# Altium PCB test.PcbDoc
Units mm, origin at the board's own origin, x right, y up, seen from the top; angles counter-clockwise.
Board outline 48.01 x 42.93 mm, 2 copper layers (Top Layer, Bottom Layer); 5 components, 0 nets, 72 pads, 0 vias.
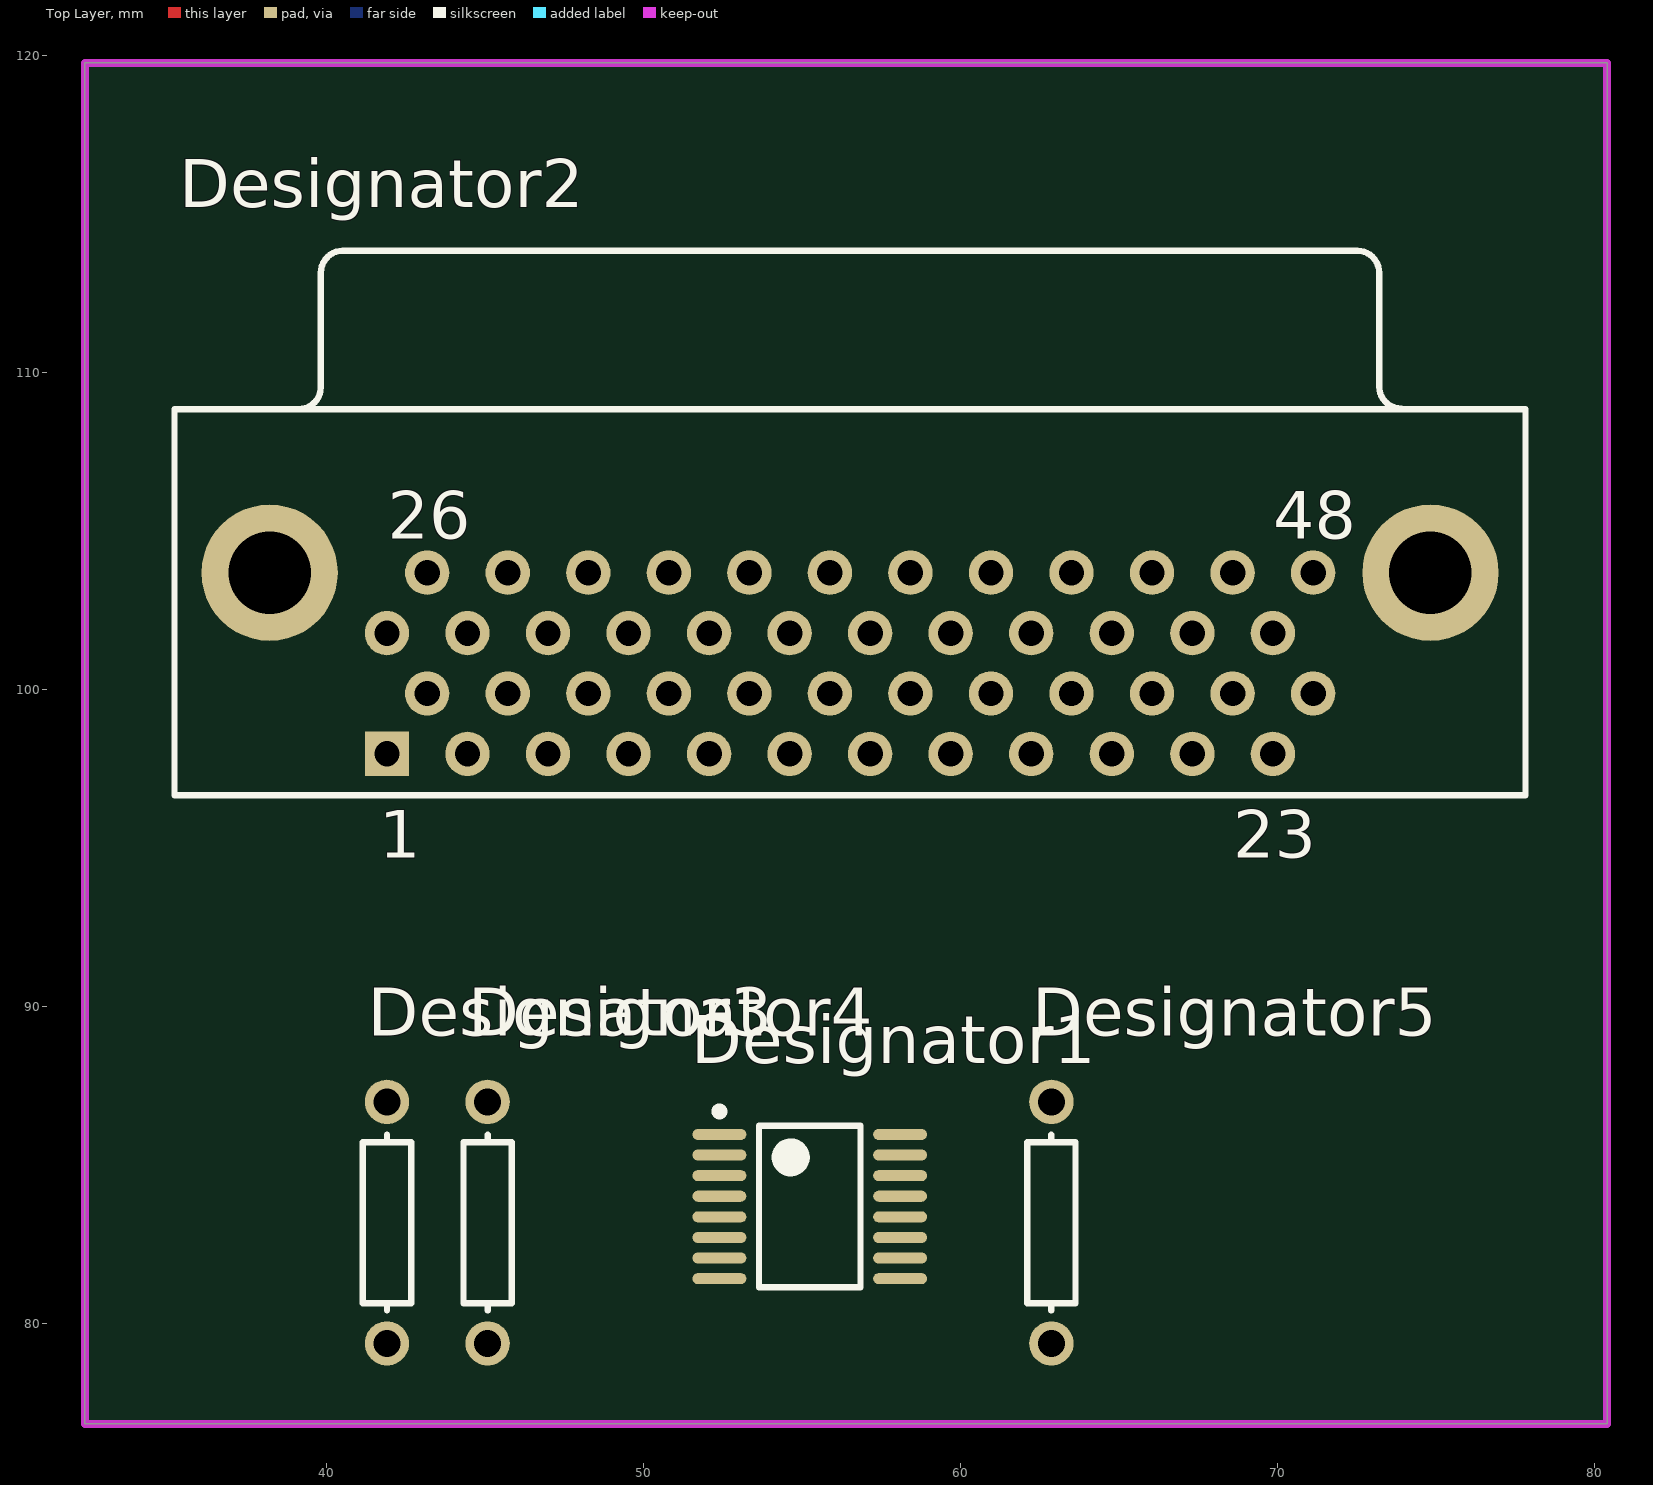
[diagram p0: Top Layer view]
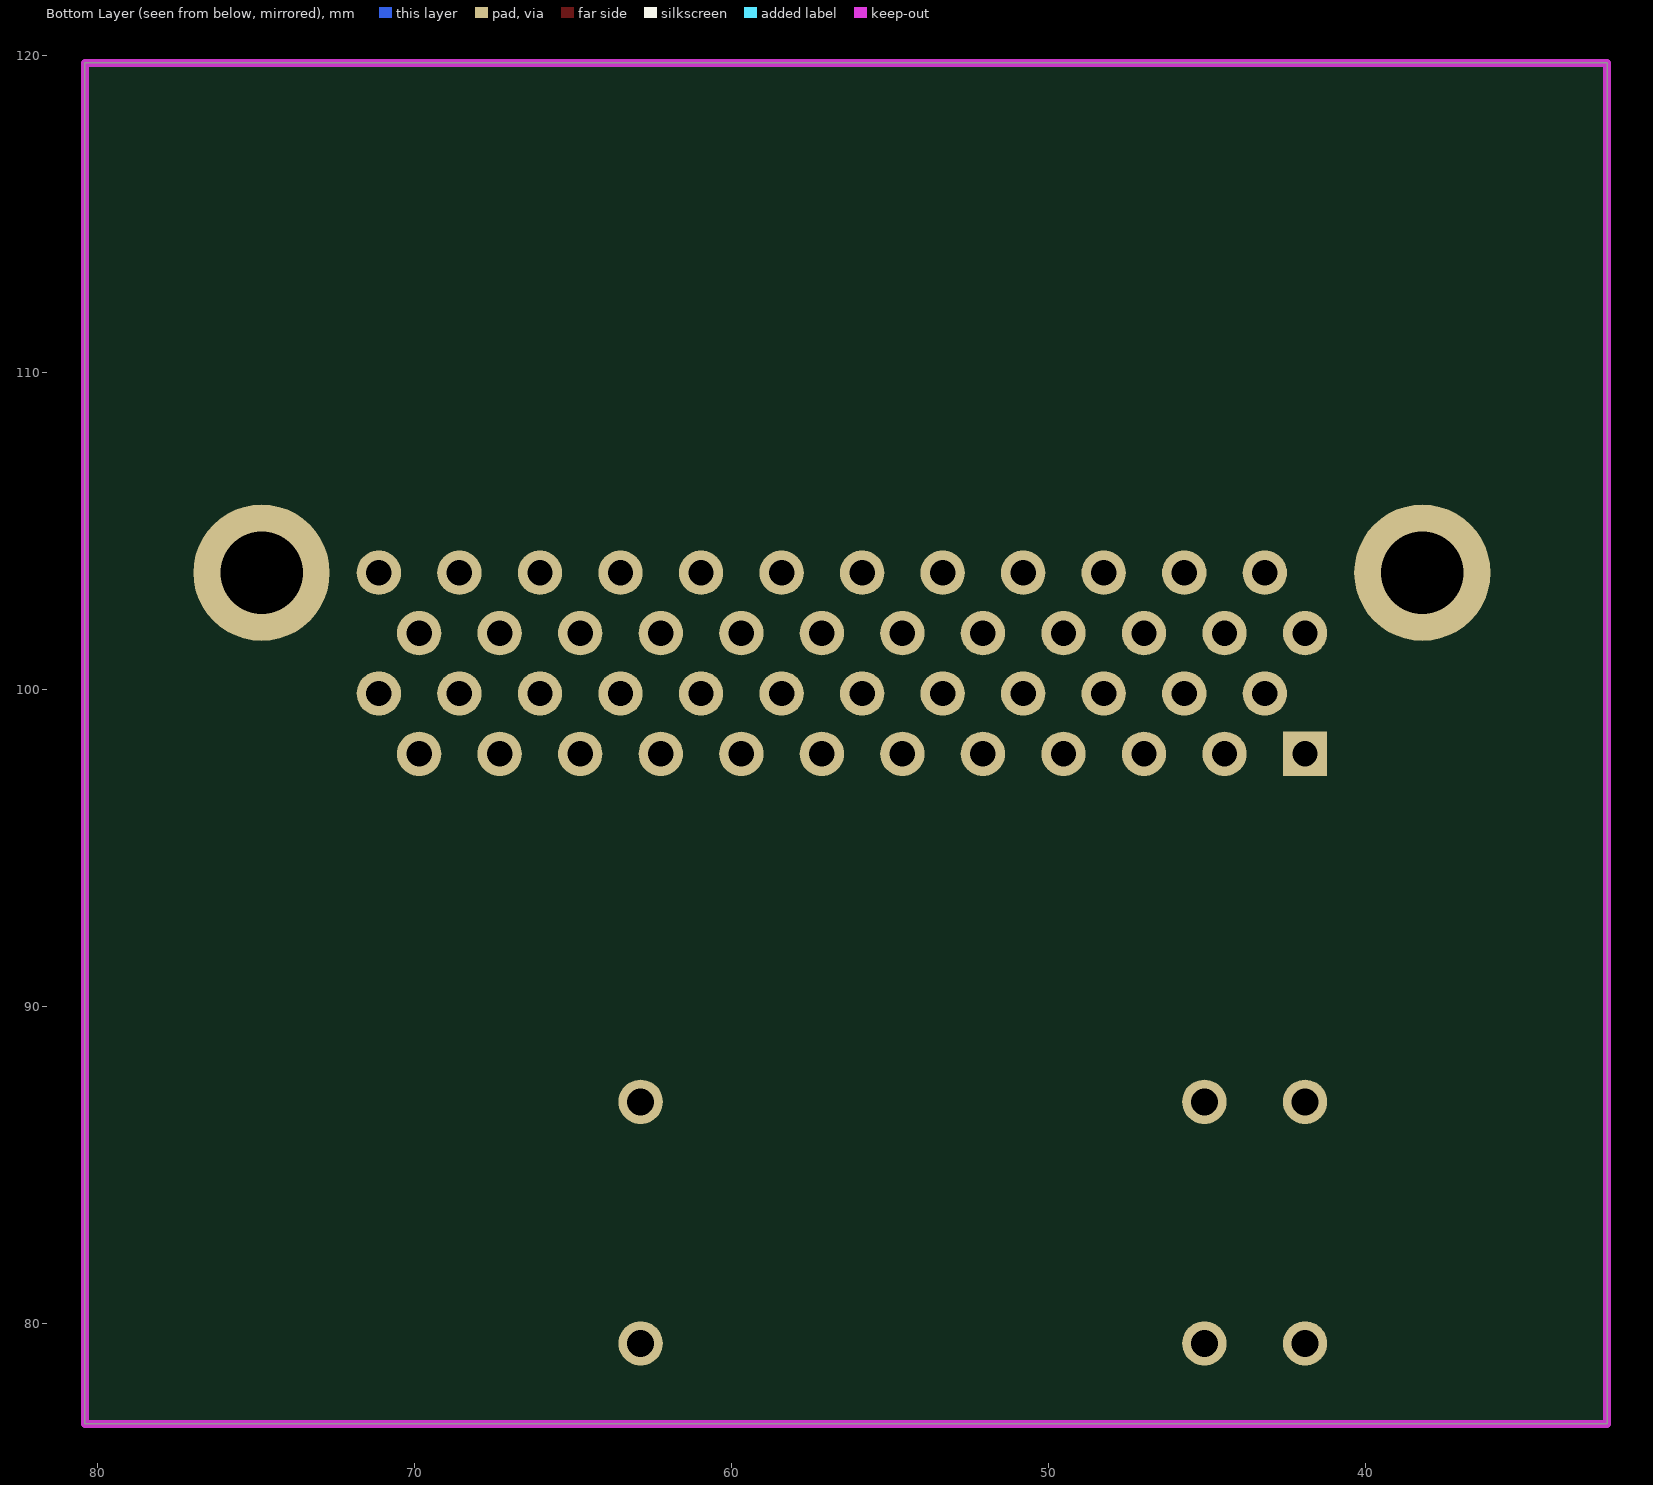
[diagram p1: Bottom Layer view, seen from below]

## Layer stack, top to bottom
Top Solder: solder mask 0.0102, Solder Resist, Dk 3.5
Top Layer: signal copper 0.0356
Dielectric 1: dielectric 0.32, FR-4, Dk 4.8
Bottom Layer: signal copper 0.0356
Bottom Solder: solder mask 0.0102, Solder Resist, Dk 3.5

## Board outline
32.385,76.835 32.385,119.761 80.391,119.761 80.391,76.835

## Design rules (kind name [scope] priority, off if disabled: settings)
Clearance [All] p1: gap=0.254
PolygonConnect [All] p1: connectstyle=Relief reliefconductorwidth=0.254 reliefentries=4 polygonreliefangle="90 Angle" airgapwidth=0.254
RoutingVias [All] p1: holewidth=0.711 width=1.27 viastyle="Through Hole" minholewidth=0.711 minwidth=1.27 maxholewidth=0.711 maxwidth=1.27
SolderMaskExpansion [All] p1: expansion=0.102
UnpouredPolygon [All] p1: allowunpoured=FALSE
Width [All] p1: maxlimit=0.254 minlimit=0.254 preferedwidth=0.254
29 further rules are at their usual default settings.

## Components (designator, comment, footprint, x,y, rotation, side; value= is the part's Value field where it differs from the comment)
Designator1 "Comment" SOT403-1_N 55.245,83.693 r0 top
Designator2 "Comment" 050DSUB1.27-2H48 56.515,108.839 r0 top
Designator3 "Comment" AXIAL-0.3 41.91,83.185 r90 top
Designator4 "Comment" AXIAL-0.3 45.085,83.185 r90 top
Designator5 "Comment" AXIAL-0.3 62.865,83.185 r90 top

## Footprints (in the part's own frame and the unit in brackets; to place one, negate y for a bottom-side part, rotate by r counter-clockwise, add the part's x,y. Pads: shape width x height; smd on the part's side, far side on the other; paste and mask are expansions set on the pad)
050DSUB1.27-2H48 [mm] "Connector; D Subminiature; 48 Position; Right Angle; Pitch 1.27 mm"
  rect 1.4x1.4 hole 0.8: 1(-14.605,-10.87)
  round 1.4 hole 0.8: 2(-13.335,-8.965) 3(-12.065,-10.87) 4(-10.795,-8.965) 5(-9.525,-10.87) 6(-8.255,-8.965) 7(-6.985,-10.87) 8(-5.715,-8.965) 9(-4.445,-10.87) 10(-3.175,-8.965) 11(-1.905,-10.87) 12(-0.635,-8.965) 13(0.635,-10.87) 14(1.905,-8.965) 15(3.175,-10.87) 16(4.445,-8.965) 17(5.715,-10.87) 18(6.985,-8.965) 19(8.255,-10.87) 20(9.525,-8.965) 21(10.795,-10.87) 22(12.065,-8.965) 23(13.335,-10.87) 24(14.605,-8.965) 25(-14.605,-7.06) 26(-13.335,-5.155) 27(-12.065,-7.06) 28(-10.795,-5.155) 29(-9.525,-7.06) 30(-8.255,-5.155) 31(-6.985,-7.06) 32(-5.715,-5.155) 33(-4.445,-7.06) 34(-3.175,-5.155) 35(-1.905,-7.06) 36(-0.635,-5.155) 37(0.635,-7.06) 38(1.905,-5.155) 39(3.175,-7.06) 40(4.445,-5.155) 41(5.715,-7.06) 42(6.985,-5.155) 43(8.255,-7.06) 44(9.525,-5.155) 45(10.795,-7.06) 46(12.065,-5.155) 47(13.335,-7.06) 48(14.605,-5.155)
  round 4.3 hole 2.6: 49(-18.305,-5.155) 50(18.305,-5.155)
  silkscreen extent -21.3,-12.17 21.31,5
AXIAL-0.3 [mm] "Axial Device, Thru-Hole; 2 Leads; 0.3 in Pin Spacing"
  round 1.4 hole 0.85: 1(-3.81,0) 2(3.81,0)
  silkscreen extent -2.77,-0.76 2.77,0.76
SOT403-1_N [mm] "TSOP, 16-Leads, Body 5x4.4mm, Pitch 0.65mm, IPC Medium Density"
  oval 1.7x0.35 smd: 1(-2.85,2.275) 2(-2.85,1.625) 3(-2.85,0.975) 4(-2.85,0.325) 5(-2.85,-0.325) 6(-2.85,-0.975) 7(-2.85,-1.625) 8(-2.85,-2.275) 9(2.85,-2.275) 10(2.85,-1.625) 11(2.85,-0.975) 12(2.85,-0.325) 13(2.85,0.325) 14(2.85,0.975) 15(2.85,1.625) 16(2.85,2.275)
  silkscreen extent -2.97,-2.55 1.6,3.12, body extent -2.25,-2.55 2.25,2.55, height 1.1

## Part data
Designator1: library part ADC-8
Designator2: library part "Connector 48"
Designator3 Designator4 Designator5: library part Res1

## Nets (pads, with @x,y where several pads share a name; then routed paths per layer and width w, separated by ;. In a path a pad name is that pad's centre, name@x,y a point inside that pad or via, vN(x,y) a via of type N, cw(c..) or ccw(c..) an arc to the next point about the centre after c; other vN are vias at no path point)
pads on no net: Designator1.1 Designator1.2 Designator1.3 Designator1.4 Designator1.5 Designator1.6 Designator1.7 Designator1.8 Designator1.9 Designator1.10 Designator1.11 Designator1.12 Designator1.13 Designator1.14 Designator1.15 Designator1.16 Designator2.1 Designator2.2 Designator2.3 Designator2.4 Designator2.5 Designator2.6 Designator2.7 Designator2.8 Designator2.9 Designator2.10 Designator2.11 Designator2.12 Designator2.13 Designator2.14 Designator2.15 Designator2.16 Designator2.17 Designator2.18 Designator2.19 Designator2.20 Designator2.21 Designator2.22 Designator2.23 Designator2.24 Designator2.25 Designator2.26 Designator2.27 Designator2.28 Designator2.29 Designator2.30 Designator2.31 Designator2.32 Designator2.33 Designator2.34 Designator2.35 Designator2.36 Designator2.37 Designator2.38 Designator2.39 Designator2.40 Designator2.41 Designator2.42 Designator2.43 Designator2.44 Designator2.45 Designator2.46 Designator2.47 Designator2.48 Designator2.49 Designator2.50 Designator3.1 Designator3.2 Designator4.1 Designator4.2 Designator5.1 Designator5.2

## Keep-outs
Keep-Out Layer:
  the board outline again, w0.254

## Text inside footprints (layer, text, board x,y; h text height)
Designator2: Top Overlay "23" at 68.6,94.694 h1.5; Top Overlay "1" at 41.66,94.694 h1.5; Top Overlay "48" at 69.87,104.759 h1.5; Top Overlay "26" at 41.93,104.759 h1.5